# EAGLE board SparkFun_ADMP401-Breakout_Panel_v13 (EAGLE 7.4.0), part 1 of 6
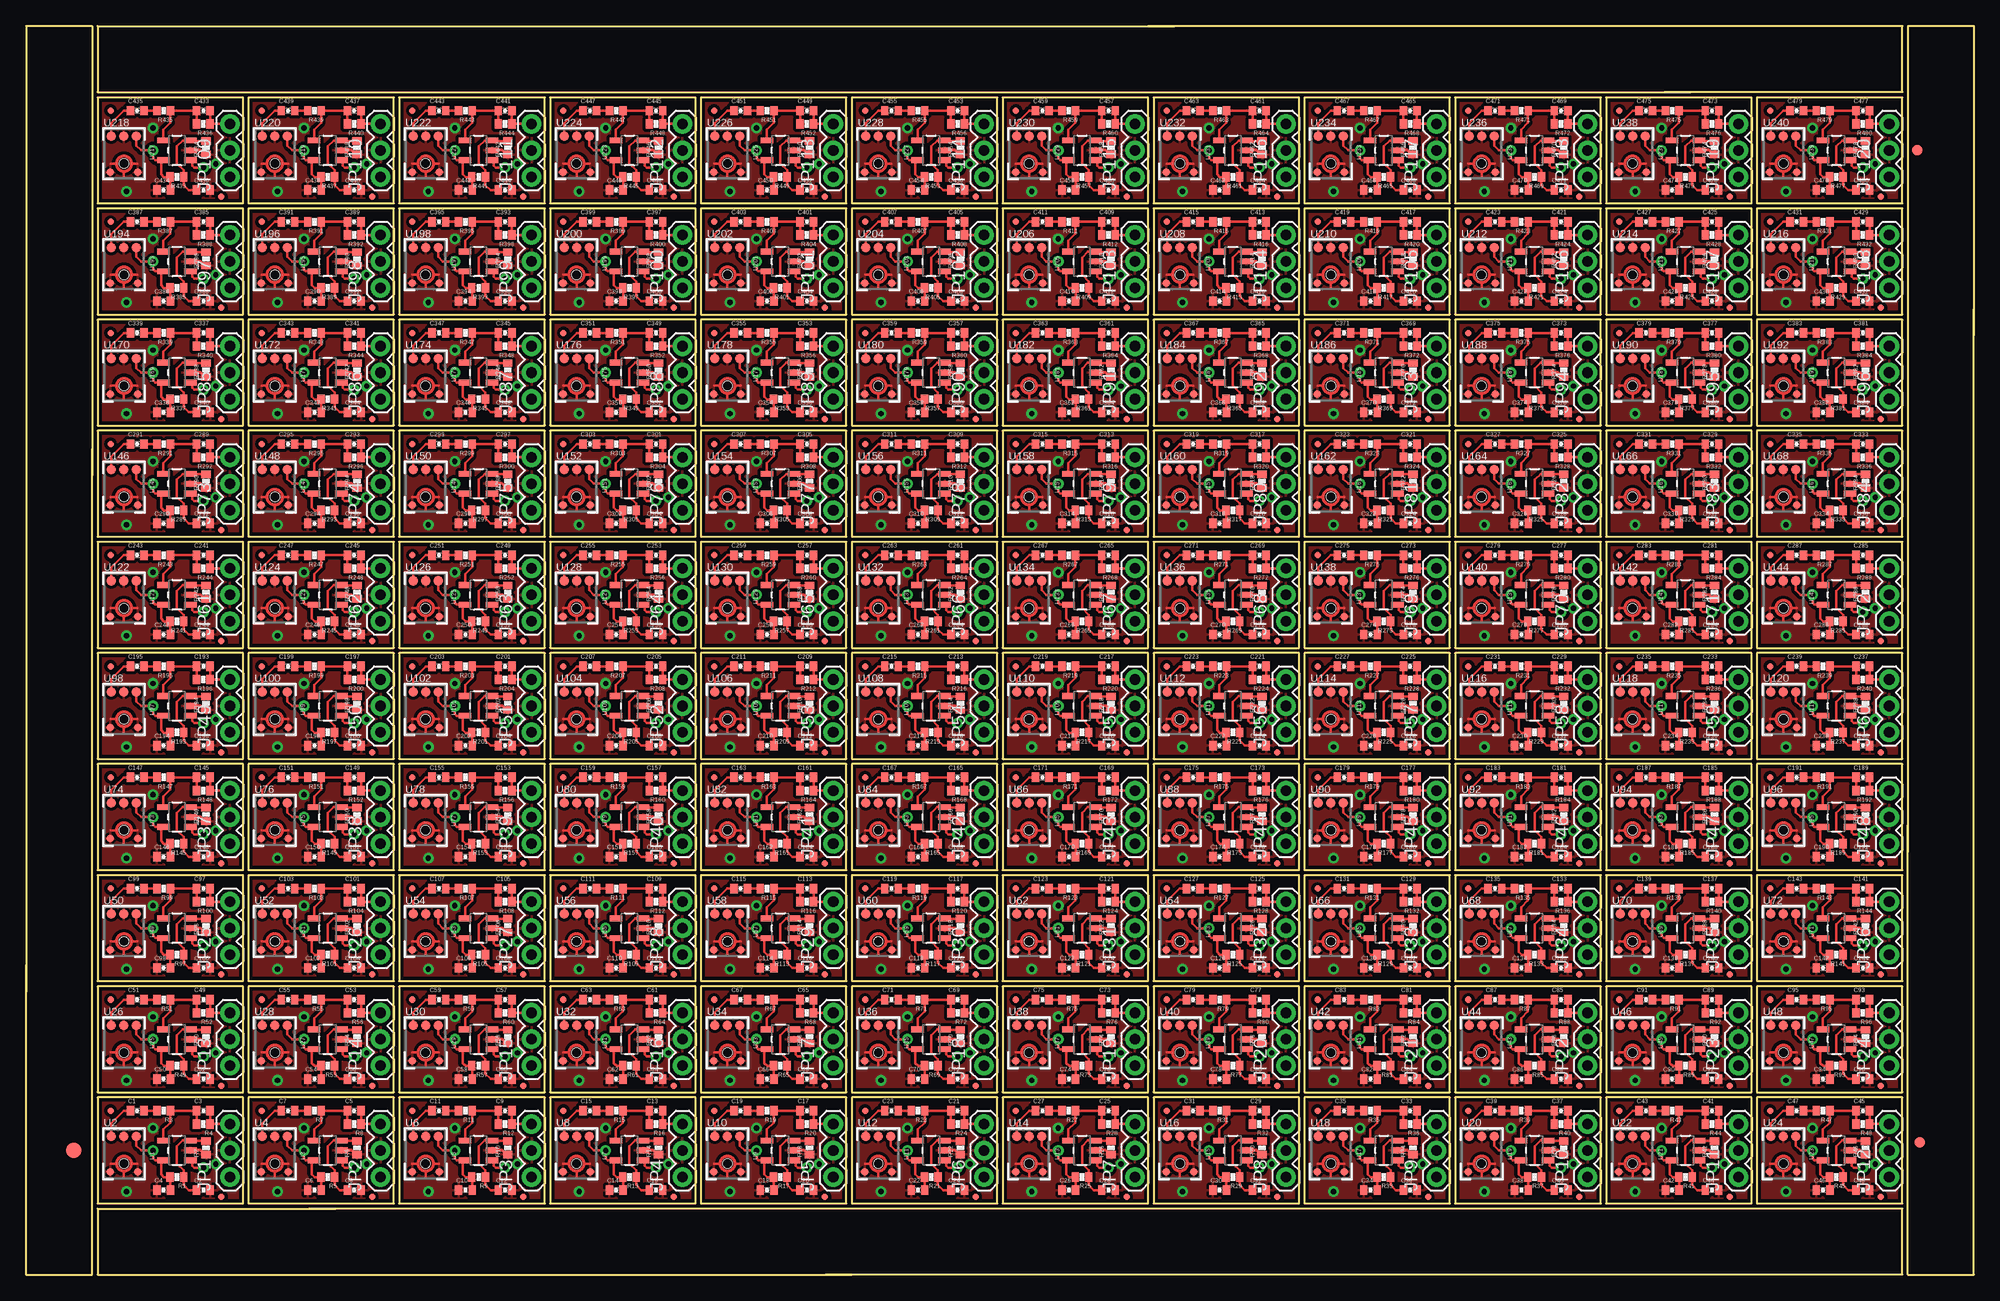
[diagram p0: board, top side]
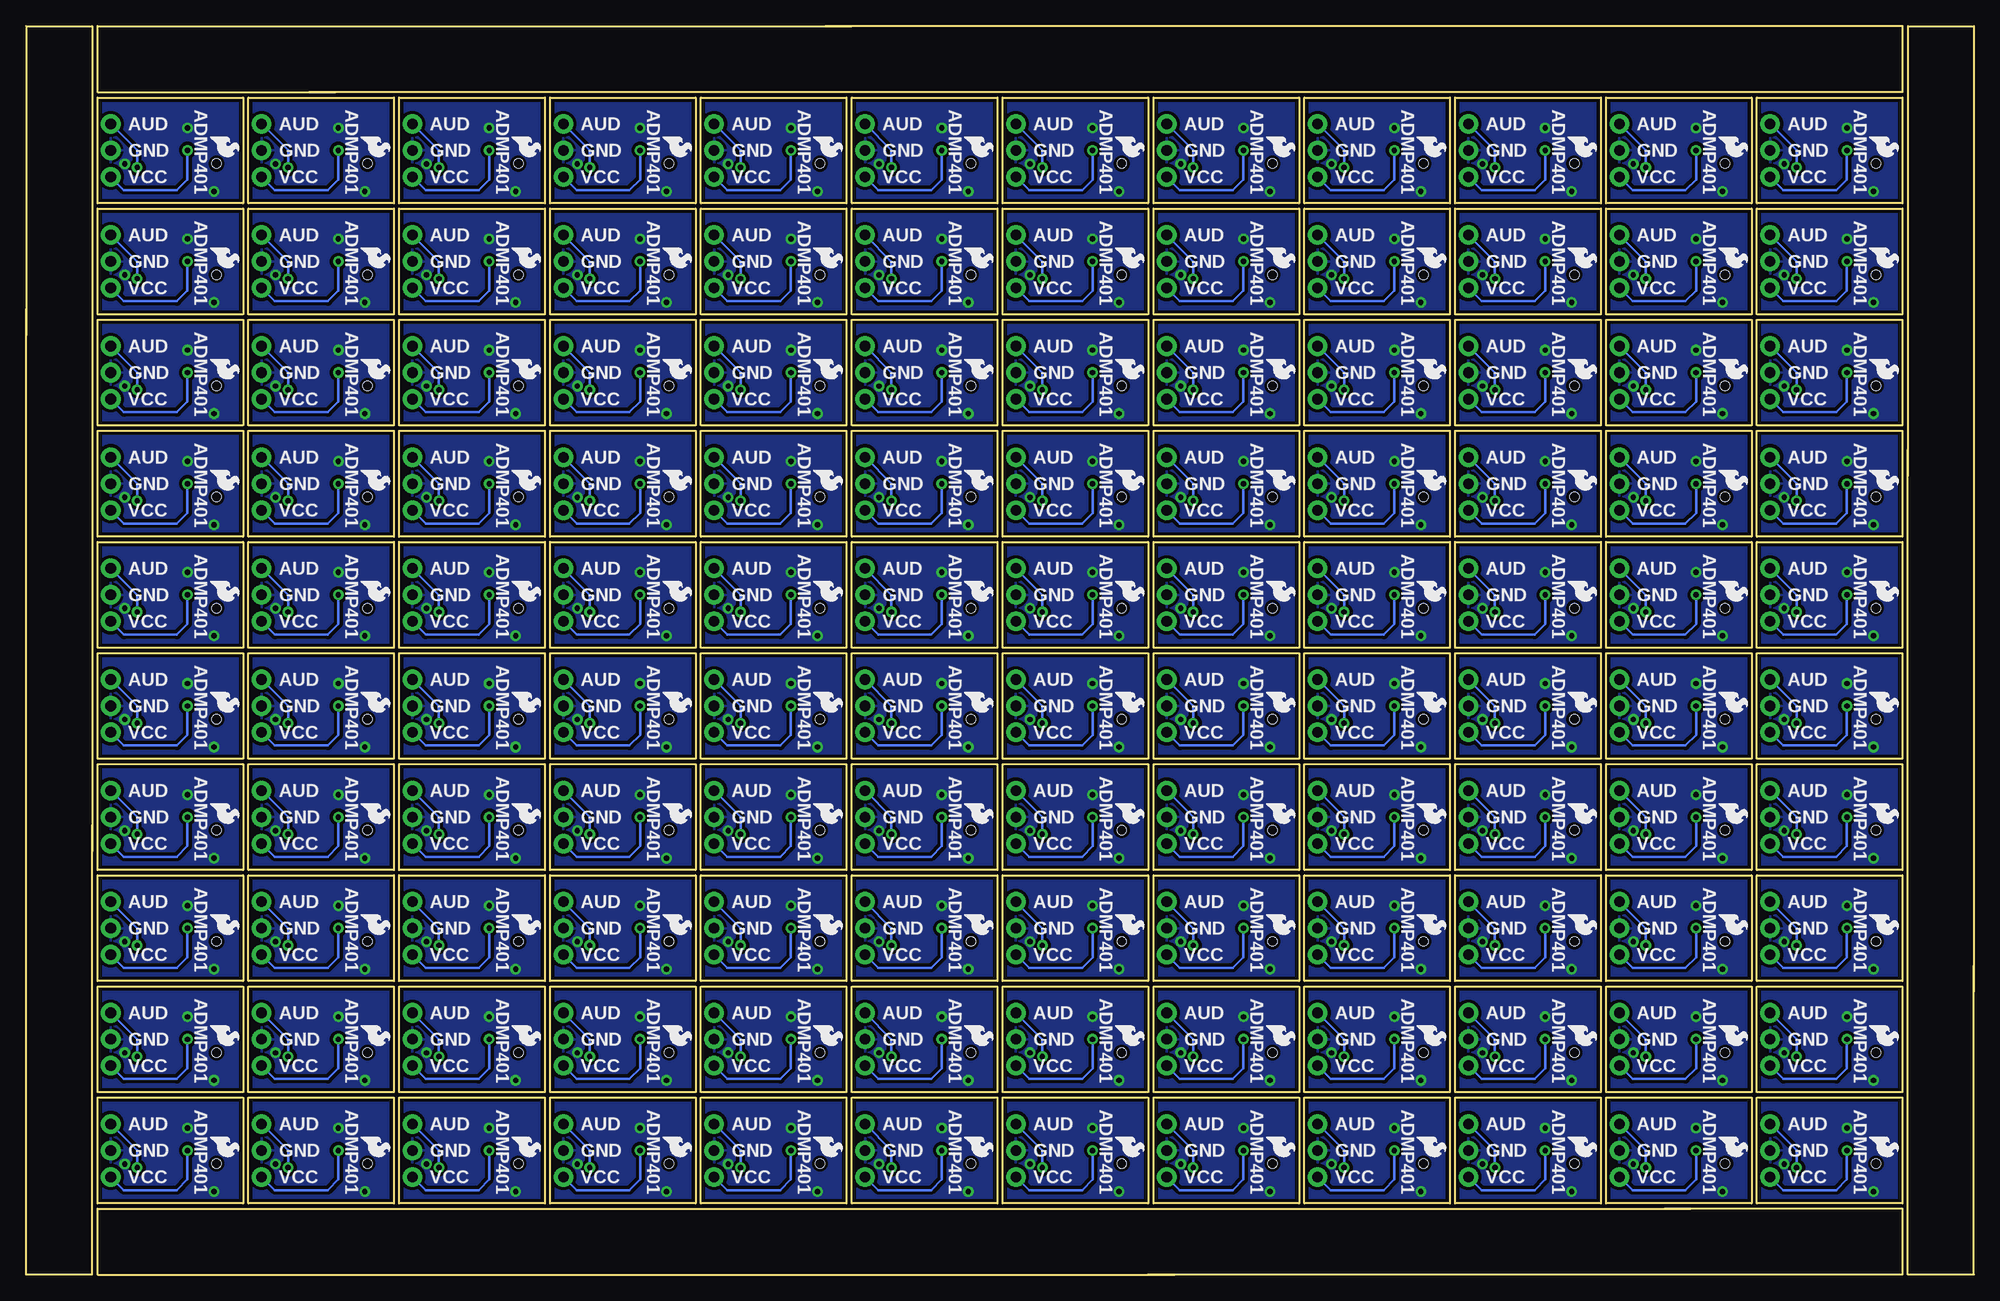
[diagram p1: board, bottom side, seen from below]

Size 186.94 x 119.89 mm. Coordinates in mm from the lower left corner, seen from the top.
Outline: 504 segments
Copper layers (1*16): Top 0.035mm / dielectric 1.5mm / Bottom 0.035mm
Design rules "SparkFun": minimum track width 8mil, minimum drill 20mil, track to track 8mil, track to pad 8mil, pad to pad 8mil, via to via 8mil, smd to smd 8mil, copper to edge 9mil, drill to drill 8mil, minimum pad ring 12mil, minimum via ring 10mil, stop-mask expansion 4mil, vias tented up to drill 20mil, thermal gap 10mil

## Footprints (pad centres in the part's own frame; a part is rotated, then mirrored left to right if it is on the bottom)
0402-CAP = smd 0.7 x 0.9: 1 -0.65,0; 2 0.65,0
MICRO-FIDUCIAL = smd 0.635 x 0.635: 1 0,0
FIDUCIAL-1.5X3 = smd 1.5 x 1.5: 1 0,0
FIDUCIAL-1X2 = smd 1 x 1: 1 0,0
1X03 = drill 1.016 pad 1.88: 1 0,0; 2 2.54,0; 3 5.08,0
0402-RES = smd 0.7 x 0.9: 1 -0.65,0; 2 0.65,0
SOT23-5 = smd 0.55 x 1.2: 1 -0.95,-1.3; 2 0,-1.3; 3 0.95,-1.3; 4 0.95,1.3; 5 -0.95,1.3
ADMP401 = smd 0.9 x 0.9: 1 -1.2,2.62; 5 1.2,2.62; 6 0,2.62 | smd 0.7 x 0.7: 2 1.3,-0.8; 4 -1.3,-0.8 | hole 0.9: 0,0

## Placement (x,y rotation side)
C1  4.7uF  [0402-CAP]  10.67,15.75 0 top
C2  1.0uF  [0402-CAP]  17.02,8.13 0 top
C3  100pF  [0402-CAP]  17.02,15.75 0 top
C4  0.1uF  [0402-CAP]  13.21,8.13 0 top
C5  100pF  [0402-CAP]  31.5,15.75 0 top
C6  0.1uF  [0402-CAP]  27.69,8.13 0 top
C7  4.7uF  [0402-CAP]  25.15,15.75 0 top
C8  1.0uF  [0402-CAP]  31.5,8.13 0 top
C9  100pF  [0402-CAP]  45.97,15.75 0 top
C10  0.1uF  [0402-CAP]  42.16,8.13 0 top
C11  4.7uF  [0402-CAP]  39.62,15.75 0 top
C12  1.0uF  [0402-CAP]  45.97,8.13 0 top
C13  100pF  [0402-CAP]  60.45,15.75 0 top
C14  0.1uF  [0402-CAP]  56.64,8.13 0 top
C15  4.7uF  [0402-CAP]  54.1,15.75 0 top
C16  1.0uF  [0402-CAP]  60.45,8.13 0 top
C17  100pF  [0402-CAP]  74.93,15.75 0 top
C18  0.1uF  [0402-CAP]  71.12,8.13 0 top
C19  4.7uF  [0402-CAP]  68.58,15.75 0 top
C20  1.0uF  [0402-CAP]  74.93,8.13 0 top
C21  100pF  [0402-CAP]  89.41,15.75 0 top
C22  0.1uF  [0402-CAP]  85.6,8.13 0 top
C23  4.7uF  [0402-CAP]  83.06,15.75 0 top
C24  1.0uF  [0402-CAP]  89.41,8.13 0 top
C25  100pF  [0402-CAP]  103.89,15.75 0 top
C26  0.1uF  [0402-CAP]  100.08,8.13 0 top
C27  4.7uF  [0402-CAP]  97.54,15.75 0 top
C28  1.0uF  [0402-CAP]  103.89,8.13 0 top
C29  100pF  [0402-CAP]  118.36,15.75 0 top
C30  0.1uF  [0402-CAP]  114.55,8.13 0 top
C31  4.7uF  [0402-CAP]  112.01,15.75 0 top
C32  1.0uF  [0402-CAP]  118.36,8.13 0 top
C33  100pF  [0402-CAP]  132.84,15.75 0 top
C34  0.1uF  [0402-CAP]  129.03,8.13 0 top
C35  4.7uF  [0402-CAP]  126.49,15.75 0 top
C36  1.0uF  [0402-CAP]  132.84,8.13 0 top
C37  100pF  [0402-CAP]  147.32,15.75 0 top
C38  0.1uF  [0402-CAP]  143.51,8.13 0 top
C39  4.7uF  [0402-CAP]  140.97,15.75 0 top
C40  1.0uF  [0402-CAP]  147.32,8.13 0 top
C41  100pF  [0402-CAP]  161.8,15.75 0 top
C42  0.1uF  [0402-CAP]  157.99,8.13 0 top
C43  4.7uF  [0402-CAP]  155.45,15.75 0 top
C44  1.0uF  [0402-CAP]  161.8,8.13 0 top
C45  100pF  [0402-CAP]  176.28,15.75 0 top
C46  0.1uF  [0402-CAP]  172.47,8.13 0 top
C47  4.7uF  [0402-CAP]  169.93,15.75 0 top
C48  1.0uF  [0402-CAP]  176.28,8.13 0 top
C49  100pF  [0402-CAP]  17.02,26.42 0 top
C50  0.1uF  [0402-CAP]  13.21,18.8 0 top
C51  4.7uF  [0402-CAP]  10.67,26.42 0 top
C52  1.0uF  [0402-CAP]  17.02,18.8 0 top
C53  100pF  [0402-CAP]  31.5,26.42 0 top
C54  0.1uF  [0402-CAP]  27.69,18.8 0 top
C55  4.7uF  [0402-CAP]  25.15,26.42 0 top
C56  1.0uF  [0402-CAP]  31.5,18.8 0 top
C57  100pF  [0402-CAP]  45.97,26.42 0 top
C58  0.1uF  [0402-CAP]  42.16,18.8 0 top
C59  4.7uF  [0402-CAP]  39.62,26.42 0 top
C60  1.0uF  [0402-CAP]  45.97,18.8 0 top
C61  100pF  [0402-CAP]  60.45,26.42 0 top
C62  0.1uF  [0402-CAP]  56.64,18.8 0 top
C63  4.7uF  [0402-CAP]  54.1,26.42 0 top
C64  1.0uF  [0402-CAP]  60.45,18.8 0 top
C65  100pF  [0402-CAP]  74.93,26.42 0 top
C66  0.1uF  [0402-CAP]  71.12,18.8 0 top
C67  4.7uF  [0402-CAP]  68.58,26.42 0 top
C68  1.0uF  [0402-CAP]  74.93,18.8 0 top
C69  100pF  [0402-CAP]  89.41,26.42 0 top
C70  0.1uF  [0402-CAP]  85.6,18.8 0 top
C71  4.7uF  [0402-CAP]  83.06,26.42 0 top
C72  1.0uF  [0402-CAP]  89.41,18.8 0 top
C73  100pF  [0402-CAP]  103.89,26.42 0 top
C74  0.1uF  [0402-CAP]  100.08,18.8 0 top
C75  4.7uF  [0402-CAP]  97.54,26.42 0 top
C76  1.0uF  [0402-CAP]  103.89,18.8 0 top
C77  100pF  [0402-CAP]  118.36,26.42 0 top
C78  0.1uF  [0402-CAP]  114.55,18.8 0 top
C79  4.7uF  [0402-CAP]  112.01,26.42 0 top
C80  1.0uF  [0402-CAP]  118.36,18.8 0 top
C81  100pF  [0402-CAP]  132.84,26.42 0 top
C82  0.1uF  [0402-CAP]  129.03,18.8 0 top
C83  4.7uF  [0402-CAP]  126.49,26.42 0 top
C84  1.0uF  [0402-CAP]  132.84,18.8 0 top
C85  100pF  [0402-CAP]  147.32,26.42 0 top
C86  0.1uF  [0402-CAP]  143.51,18.8 0 top
C87  4.7uF  [0402-CAP]  140.97,26.42 0 top
C88  1.0uF  [0402-CAP]  147.32,18.8 0 top
C89  100pF  [0402-CAP]  161.8,26.42 0 top
C90  0.1uF  [0402-CAP]  157.99,18.8 0 top
C91  4.7uF  [0402-CAP]  155.45,26.42 0 top
C92  1.0uF  [0402-CAP]  161.8,18.8 0 top
C93  100pF  [0402-CAP]  176.28,26.42 0 top
C94  0.1uF  [0402-CAP]  172.47,18.8 0 top
C95  4.7uF  [0402-CAP]  169.93,26.42 0 top
C96  1.0uF  [0402-CAP]  176.28,18.8 0 top
C97  100pF  [0402-CAP]  17.02,37.08 0 top
C98  0.1uF  [0402-CAP]  13.21,29.46 0 top
C99  4.7uF  [0402-CAP]  10.67,37.08 0 top
C100  1.0uF  [0402-CAP]  17.02,29.46 0 top
C101  100pF  [0402-CAP]  31.5,37.08 0 top
C102  0.1uF  [0402-CAP]  27.69,29.46 0 top
C103  4.7uF  [0402-CAP]  25.15,37.08 0 top
C104  1.0uF  [0402-CAP]  31.5,29.46 0 top
C105  100pF  [0402-CAP]  45.97,37.08 0 top
C106  0.1uF  [0402-CAP]  42.16,29.46 0 top
C107  4.7uF  [0402-CAP]  39.62,37.08 0 top
C108  1.0uF  [0402-CAP]  45.97,29.46 0 top
C109  100pF  [0402-CAP]  60.45,37.08 0 top
C110  0.1uF  [0402-CAP]  56.64,29.46 0 top
C111  4.7uF  [0402-CAP]  54.1,37.08 0 top
C112  1.0uF  [0402-CAP]  60.45,29.46 0 top
C113  100pF  [0402-CAP]  74.93,37.08 0 top
C114  0.1uF  [0402-CAP]  71.12,29.46 0 top
C115  4.7uF  [0402-CAP]  68.58,37.08 0 top
C116  1.0uF  [0402-CAP]  74.93,29.46 0 top
C117  100pF  [0402-CAP]  89.41,37.08 0 top
C118  0.1uF  [0402-CAP]  85.6,29.46 0 top
C119  4.7uF  [0402-CAP]  83.06,37.08 0 top
C120  1.0uF  [0402-CAP]  89.41,29.46 0 top
C121  100pF  [0402-CAP]  103.89,37.08 0 top
C122  0.1uF  [0402-CAP]  100.08,29.46 0 top
C123  4.7uF  [0402-CAP]  97.54,37.08 0 top
C124  1.0uF  [0402-CAP]  103.89,29.46 0 top
C125  100pF  [0402-CAP]  118.36,37.08 0 top
C126  0.1uF  [0402-CAP]  114.55,29.46 0 top
C127  4.7uF  [0402-CAP]  112.01,37.08 0 top
C128  1.0uF  [0402-CAP]  118.36,29.46 0 top
C129  100pF  [0402-CAP]  132.84,37.08 0 top
C130  0.1uF  [0402-CAP]  129.03,29.46 0 top
C131  4.7uF  [0402-CAP]  126.49,37.08 0 top
C132  1.0uF  [0402-CAP]  132.84,29.46 0 top
C133  100pF  [0402-CAP]  147.32,37.08 0 top
C134  0.1uF  [0402-CAP]  143.51,29.46 0 top
C135  4.7uF  [0402-CAP]  140.97,37.08 0 top
C136  1.0uF  [0402-CAP]  147.32,29.46 0 top
C137  100pF  [0402-CAP]  161.8,37.08 0 top
C138  0.1uF  [0402-CAP]  157.99,29.46 0 top
C139  4.7uF  [0402-CAP]  155.45,37.08 0 top
C140  1.0uF  [0402-CAP]  161.8,29.46 0 top
C141  100pF  [0402-CAP]  176.28,37.08 0 top
C142  0.1uF  [0402-CAP]  172.47,29.46 0 top
C143  4.7uF  [0402-CAP]  169.93,37.08 0 top
C144  1.0uF  [0402-CAP]  176.28,29.46 0 top
C145  100pF  [0402-CAP]  17.02,47.75 0 top
C146  0.1uF  [0402-CAP]  13.21,40.13 0 top
C147  4.7uF  [0402-CAP]  10.67,47.75 0 top
C148  1.0uF  [0402-CAP]  17.02,40.13 0 top
C149  100pF  [0402-CAP]  31.5,47.75 0 top
C150  0.1uF  [0402-CAP]  27.69,40.13 0 top
C151  4.7uF  [0402-CAP]  25.15,47.75 0 top
C152  1.0uF  [0402-CAP]  31.5,40.13 0 top
C153  100pF  [0402-CAP]  45.97,47.75 0 top
C154  0.1uF  [0402-CAP]  42.16,40.13 0 top
C155  4.7uF  [0402-CAP]  39.62,47.75 0 top
C156  1.0uF  [0402-CAP]  45.97,40.13 0 top
C157  100pF  [0402-CAP]  60.45,47.75 0 top
C158  0.1uF  [0402-CAP]  56.64,40.13 0 top
C159  4.7uF  [0402-CAP]  54.1,47.75 0 top
C160  1.0uF  [0402-CAP]  60.45,40.13 0 top
C161  100pF  [0402-CAP]  74.93,47.75 0 top
C162  0.1uF  [0402-CAP]  71.12,40.13 0 top
C163  4.7uF  [0402-CAP]  68.58,47.75 0 top
C164  1.0uF  [0402-CAP]  74.93,40.13 0 top
C165  100pF  [0402-CAP]  89.41,47.75 0 top
C166  0.1uF  [0402-CAP]  85.6,40.13 0 top
C167  4.7uF  [0402-CAP]  83.06,47.75 0 top
C168  1.0uF  [0402-CAP]  89.41,40.13 0 top
C169  100pF  [0402-CAP]  103.89,47.75 0 top
C170  0.1uF  [0402-CAP]  100.08,40.13 0 top
C171  4.7uF  [0402-CAP]  97.54,47.75 0 top
C172  1.0uF  [0402-CAP]  103.89,40.13 0 top
C173  100pF  [0402-CAP]  118.36,47.75 0 top
C174  0.1uF  [0402-CAP]  114.55,40.13 0 top
C175  4.7uF  [0402-CAP]  112.01,47.75 0 top
C176  1.0uF  [0402-CAP]  118.36,40.13 0 top
C177  100pF  [0402-CAP]  132.84,47.75 0 top
C178  0.1uF  [0402-CAP]  129.03,40.13 0 top
C179  4.7uF  [0402-CAP]  126.49,47.75 0 top
C180  1.0uF  [0402-CAP]  132.84,40.13 0 top
C181  100pF  [0402-CAP]  147.32,47.75 0 top
C182  0.1uF  [0402-CAP]  143.51,40.13 0 top
C183  4.7uF  [0402-CAP]  140.97,47.75 0 top
C184  1.0uF  [0402-CAP]  147.32,40.13 0 top
C185  100pF  [0402-CAP]  161.8,47.75 0 top
C186  0.1uF  [0402-CAP]  157.99,40.13 0 top
C187  4.7uF  [0402-CAP]  155.45,47.75 0 top
C188  1.0uF  [0402-CAP]  161.8,40.13 0 top
C189  100pF  [0402-CAP]  176.28,47.75 0 top
C190  0.1uF  [0402-CAP]  172.47,40.13 0 top
C191  4.7uF  [0402-CAP]  169.93,47.75 0 top
C192  1.0uF  [0402-CAP]  176.28,40.13 0 top
C193  100pF  [0402-CAP]  17.02,58.42 0 top
C194  0.1uF  [0402-CAP]  13.21,50.8 0 top
C195  4.7uF  [0402-CAP]  10.67,58.42 0 top
C196  1.0uF  [0402-CAP]  17.02,50.8 0 top
C197  100pF  [0402-CAP]  31.5,58.42 0 top
C198  0.1uF  [0402-CAP]  27.69,50.8 0 top
C199  4.7uF  [0402-CAP]  25.15,58.42 0 top
C200  1.0uF  [0402-CAP]  31.5,50.8 0 top
C201  100pF  [0402-CAP]  45.97,58.42 0 top
C202  0.1uF  [0402-CAP]  42.16,50.8 0 top
C203  4.7uF  [0402-CAP]  39.62,58.42 0 top
C204  1.0uF  [0402-CAP]  45.97,50.8 0 top
C205  100pF  [0402-CAP]  60.45,58.42 0 top
C206  0.1uF  [0402-CAP]  56.64,50.8 0 top
C207  4.7uF  [0402-CAP]  54.1,58.42 0 top
C208  1.0uF  [0402-CAP]  60.45,50.8 0 top
C209  100pF  [0402-CAP]  74.93,58.42 0 top
C210  0.1uF  [0402-CAP]  71.12,50.8 0 top
C211  4.7uF  [0402-CAP]  68.58,58.42 0 top
C212  1.0uF  [0402-CAP]  74.93,50.8 0 top
C213  100pF  [0402-CAP]  89.41,58.42 0 top
C214  0.1uF  [0402-CAP]  85.6,50.8 0 top
C215  4.7uF  [0402-CAP]  83.06,58.42 0 top
C216  1.0uF  [0402-CAP]  89.41,50.8 0 top
C217  100pF  [0402-CAP]  103.89,58.42 0 top
C218  0.1uF  [0402-CAP]  100.08,50.8 0 top
C219  4.7uF  [0402-CAP]  97.54,58.42 0 top
C220  1.0uF  [0402-CAP]  103.89,50.8 0 top
C221  100pF  [0402-CAP]  118.36,58.42 0 top
C222  0.1uF  [0402-CAP]  114.55,50.8 0 top
C223  4.7uF  [0402-CAP]  112.01,58.42 0 top
C224  1.0uF  [0402-CAP]  118.36,50.8 0 top
C225  100pF  [0402-CAP]  132.84,58.42 0 top
C226  0.1uF  [0402-CAP]  129.03,50.8 0 top
C227  4.7uF  [0402-CAP]  126.49,58.42 0 top
C228  1.0uF  [0402-CAP]  132.84,50.8 0 top
C229  100pF  [0402-CAP]  147.32,58.42 0 top
C230  0.1uF  [0402-CAP]  143.51,50.8 0 top
C231  4.7uF  [0402-CAP]  140.97,58.42 0 top
C232  1.0uF  [0402-CAP]  147.32,50.8 0 top
C233  100pF  [0402-CAP]  161.8,58.42 0 top
C234  0.1uF  [0402-CAP]  157.99,50.8 0 top
C235  4.7uF  [0402-CAP]  155.45,58.42 0 top
C236  1.0uF  [0402-CAP]  161.8,50.8 0 top
C237  100pF  [0402-CAP]  176.28,58.42 0 top
C238  0.1uF  [0402-CAP]  172.47,50.8 0 top
C239  4.7uF  [0402-CAP]  169.93,58.42 0 top
C240  1.0uF  [0402-CAP]  176.28,50.8 0 top
C241  100pF  [0402-CAP]  17.02,69.09 0 top
C242  0.1uF  [0402-CAP]  13.21,61.47 0 top
C243  4.7uF  [0402-CAP]  10.67,69.09 0 top
C244  1.0uF  [0402-CAP]  17.02,61.47 0 top
C245  100pF  [0402-CAP]  31.5,69.09 0 top
C246  0.1uF  [0402-CAP]  27.69,61.47 0 top
C247  4.7uF  [0402-CAP]  25.15,69.09 0 top
C248  1.0uF  [0402-CAP]  31.5,61.47 0 top
C249  100pF  [0402-CAP]  45.97,69.09 0 top
C250  0.1uF  [0402-CAP]  42.16,61.47 0 top
C251  4.7uF  [0402-CAP]  39.62,69.09 0 top
C252  1.0uF  [0402-CAP]  45.97,61.47 0 top
C253  100pF  [0402-CAP]  60.45,69.09 0 top
C254  0.1uF  [0402-CAP]  56.64,61.47 0 top
C255  4.7uF  [0402-CAP]  54.1,69.09 0 top
C256  1.0uF  [0402-CAP]  60.45,61.47 0 top
C257  100pF  [0402-CAP]  74.93,69.09 0 top
C258  0.1uF  [0402-CAP]  71.12,61.47 0 top
C259  4.7uF  [0402-CAP]  68.58,69.09 0 top
C260  1.0uF  [0402-CAP]  74.93,61.47 0 top
C261  100pF  [0402-CAP]  89.41,69.09 0 top
C262  0.1uF  [0402-CAP]  85.6,61.47 0 top
C263  4.7uF  [0402-CAP]  83.06,69.09 0 top
C264  1.0uF  [0402-CAP]  89.41,61.47 0 top
C265  100pF  [0402-CAP]  103.89,69.09 0 top
C266  0.1uF  [0402-CAP]  100.08,61.47 0 top
C267  4.7uF  [0402-CAP]  97.54,69.09 0 top
C268  1.0uF  [0402-CAP]  103.89,61.47 0 top
C269  100pF  [0402-CAP]  118.36,69.09 0 top
C270  0.1uF  [0402-CAP]  114.55,61.47 0 top
C271  4.7uF  [0402-CAP]  112.01,69.09 0 top
C272  1.0uF  [0402-CAP]  118.36,61.47 0 top
C273  100pF  [0402-CAP]  132.84,69.09 0 top
C274  0.1uF  [0402-CAP]  129.03,61.47 0 top
C275  4.7uF  [0402-CAP]  126.49,69.09 0 top
C276  1.0uF  [0402-CAP]  132.84,61.47 0 top
C277  100pF  [0402-CAP]  147.32,69.09 0 top
C278  0.1uF  [0402-CAP]  143.51,61.47 0 top
C279  4.7uF  [0402-CAP]  140.97,69.09 0 top
C280  1.0uF  [0402-CAP]  147.32,61.47 0 top
C281  100pF  [0402-CAP]  161.8,69.09 0 top
C282  0.1uF  [0402-CAP]  157.99,61.47 0 top
C283  4.7uF  [0402-CAP]  155.45,69.09 0 top
C284  1.0uF  [0402-CAP]  161.8,61.47 0 top
C285  100pF  [0402-CAP]  176.28,69.09 0 top
C286  0.1uF  [0402-CAP]  172.47,61.47 0 top
C287  4.7uF  [0402-CAP]  169.93,69.09 0 top
C288  1.0uF  [0402-CAP]  176.28,61.47 0 top
C289  100pF  [0402-CAP]  17.02,79.76 0 top
C290  0.1uF  [0402-CAP]  13.21,72.14 0 top
C291  4.7uF  [0402-CAP]  10.67,79.76 0 top
C292  1.0uF  [0402-CAP]  17.02,72.14 0 top
C293  100pF  [0402-CAP]  31.5,79.76 0 top
C294  0.1uF  [0402-CAP]  27.69,72.14 0 top
C295  4.7uF  [0402-CAP]  25.15,79.76 0 top
C296  1.0uF  [0402-CAP]  31.5,72.14 0 top
C297  100pF  [0402-CAP]  45.97,79.76 0 top
C298  0.1uF  [0402-CAP]  42.16,72.14 0 top
C299  4.7uF  [0402-CAP]  39.62,79.76 0 top
C300  1.0uF  [0402-CAP]  45.97,72.14 0 top
C301  100pF  [0402-CAP]  60.45,79.76 0 top
C302  0.1uF  [0402-CAP]  56.64,72.14 0 top
C303  4.7uF  [0402-CAP]  54.1,79.76 0 top
C304  1.0uF  [0402-CAP]  60.45,72.14 0 top
C305  100pF  [0402-CAP]  74.93,79.76 0 top
C306  0.1uF  [0402-CAP]  71.12,72.14 0 top
C307  4.7uF  [0402-CAP]  68.58,79.76 0 top
C308  1.0uF  [0402-CAP]  74.93,72.14 0 top
C309  100pF  [0402-CAP]  89.41,79.76 0 top
C310  0.1uF  [0402-CAP]  85.6,72.14 0 top
C311  4.7uF  [0402-CAP]  83.06,79.76 0 top
C312  1.0uF  [0402-CAP]  89.41,72.14 0 top
C313  100pF  [0402-CAP]  103.89,79.76 0 top
C314  0.1uF  [0402-CAP]  100.08,72.14 0 top
C315  4.7uF  [0402-CAP]  97.54,79.76 0 top
C316  1.0uF  [0402-CAP]  103.89,72.14 0 top
C317  100pF  [0402-CAP]  118.36,79.76 0 top
C318  0.1uF  [0402-CAP]  114.55,72.14 0 top
C319  4.7uF  [0402-CAP]  112.01,79.76 0 top
C320  1.0uF  [0402-CAP]  118.36,72.14 0 top
C321  100pF  [0402-CAP]  132.84,79.76 0 top
C322  0.1uF  [0402-CAP]  129.03,72.14 0 top
C323  4.7uF  [0402-CAP]  126.49,79.76 0 top
C324  1.0uF  [0402-CAP]  132.84,72.14 0 top
C325  100pF  [0402-CAP]  147.32,79.76 0 top
C326  0.1uF  [0402-CAP]  143.51,72.14 0 top
C327  4.7uF  [0402-CAP]  140.97,79.76 0 top
C328  1.0uF  [0402-CAP]  147.32,72.14 0 top
C329  100pF  [0402-CAP]  161.8,79.76 0 top
C330  0.1uF  [0402-CAP]  157.99,72.14 0 top
C331  4.7uF  [0402-CAP]  155.45,79.76 0 top
C332  1.0uF  [0402-CAP]  161.8,72.14 0 top
C333  100pF  [0402-CAP]  176.28,79.76 0 top
C334  0.1uF  [0402-CAP]  172.47,72.14 0 top
C335  4.7uF  [0402-CAP]  169.93,79.76 0 top
C336  1.0uF  [0402-CAP]  176.28,72.14 0 top
C337  100pF  [0402-CAP]  17.02,90.42 0 top
C338  0.1uF  [0402-CAP]  13.21,82.8 0 top
C339  4.7uF  [0402-CAP]  10.67,90.42 0 top
C340  1.0uF  [0402-CAP]  17.02,82.8 0 top
C341  100pF  [0402-CAP]  31.5,90.42 0 top
C342  0.1uF  [0402-CAP]  27.69,82.8 0 top
C343  4.7uF  [0402-CAP]  25.15,90.42 0 top
C344  1.0uF  [0402-CAP]  31.5,82.8 0 top
C345  100pF  [0402-CAP]  45.97,90.42 0 top
C346  0.1uF  [0402-CAP]  42.16,82.8 0 top
C347  4.7uF  [0402-CAP]  39.62,90.42 0 top
C348  1.0uF  [0402-CAP]  45.97,82.8 0 top
C349  100pF  [0402-CAP]  60.45,90.42 0 top
C350  0.1uF  [0402-CAP]  56.64,82.8 0 top
C351  4.7uF  [0402-CAP]  54.1,90.42 0 top
C352  1.0uF  [0402-CAP]  60.45,82.8 0 top
C353  100pF  [0402-CAP]  74.93,90.42 0 top
C354  0.1uF  [0402-CAP]  71.12,82.8 0 top
C355  4.7uF  [0402-CAP]  68.58,90.42 0 top
C356  1.0uF  [0402-CAP]  74.93,82.8 0 top
C357  100pF  [0402-CAP]  89.41,90.42 0 top
C358  0.1uF  [0402-CAP]  85.6,82.8 0 top
C359  4.7uF  [0402-CAP]  83.06,90.42 0 top
C360  1.0uF  [0402-CAP]  89.41,82.8 0 top
C361  100pF  [0402-CAP]  103.89,90.42 0 top
C362  0.1uF  [0402-CAP]  100.08,82.8 0 top
C363  4.7uF  [0402-CAP]  97.54,90.42 0 top
C364  1.0uF  [0402-CAP]  103.89,82.8 0 top
C365  100pF  [0402-CAP]  118.36,90.42 0 top
C366  0.1uF  [0402-CAP]  114.55,82.8 0 top
C367  4.7uF  [0402-CAP]  112.01,90.42 0 top
C368  1.0uF  [0402-CAP]  118.36,82.8 0 top
C369  100pF  [0402-CAP]  132.84,90.42 0 top
C370  0.1uF  [0402-CAP]  129.03,82.8 0 top
C371  4.7uF  [0402-CAP]  126.49,90.42 0 top
C372  1.0uF  [0402-CAP]  132.84,82.8 0 top
C373  100pF  [0402-CAP]  147.32,90.42 0 top
C374  0.1uF  [0402-CAP]  143.51,82.8 0 top
C375  4.7uF  [0402-CAP]  140.97,90.42 0 top
C376  1.0uF  [0402-CAP]  147.32,82.8 0 top
C377  100pF  [0402-CAP]  161.8,90.42 0 top
C378  0.1uF  [0402-CAP]  157.99,82.8 0 top
C379  4.7uF  [0402-CAP]  155.45,90.42 0 top
C380  1.0uF  [0402-CAP]  161.8,82.8 0 top
C381  100pF  [0402-CAP]  176.28,90.42 0 top
C382  0.1uF  [0402-CAP]  172.47,82.8 0 top
C383  4.7uF  [0402-CAP]  169.93,90.42 0 top
C384  1.0uF  [0402-CAP]  176.28,82.8 0 top
C385  100pF  [0402-CAP]  17.02,101.09 0 top
C386  0.1uF  [0402-CAP]  13.21,93.47 0 top
C387  4.7uF  [0402-CAP]  10.67,101.09 0 top
C388  1.0uF  [0402-CAP]  17.02,93.47 0 top
C389  100pF  [0402-CAP]  31.5,101.09 0 top
C390  0.1uF  [0402-CAP]  27.69,93.47 0 top
C391  4.7uF  [0402-CAP]  25.15,101.09 0 top
C392  1.0uF  [0402-CAP]  31.5,93.47 0 top
C393  100pF  [0402-CAP]  45.97,101.09 0 top
C394  0.1uF  [0402-CAP]  42.16,93.47 0 top
C395  4.7uF  [0402-CAP]  39.62,101.09 0 top
C396  1.0uF  [0402-CAP]  45.97,93.47 0 top
C397  100pF  [0402-CAP]  60.45,101.09 0 top
C398  0.1uF  [0402-CAP]  56.64,93.47 0 top
C399  4.7uF  [0402-CAP]  54.1,101.09 0 top
C400  1.0uF  [0402-CAP]  60.45,93.47 0 top
C401  100pF  [0402-CAP]  74.93,101.09 0 top
C402  0.1uF  [0402-CAP]  71.12,93.47 0 top
C403  4.7uF  [0402-CAP]  68.58,101.09 0 top
C404  1.0uF  [0402-CAP]  74.93,93.47 0 top
C405  100pF  [0402-CAP]  89.41,101.09 0 top
C406  0.1uF  [0402-CAP]  85.6,93.47 0 top
C407  4.7uF  [0402-CAP]  83.06,101.09 0 top
C408  1.0uF  [0402-CAP]  89.41,93.47 0 top
C409  100pF  [0402-CAP]  103.89,101.09 0 top
C410  0.1uF  [0402-CAP]  100.08,93.47 0 top
C411  4.7uF  [0402-CAP]  97.54,101.09 0 top
C412  1.0uF  [0402-CAP]  103.89,93.47 0 top
C413  100pF  [0402-CAP]  118.36,101.09 0 top
C414  0.1uF  [0402-CAP]  114.55,93.47 0 top
C415  4.7uF  [0402-CAP]  112.01,101.09 0 top
C416  1.0uF  [0402-CAP]  118.36,93.47 0 top
C417  100pF  [0402-CAP]  132.84,101.09 0 top
C418  0.1uF  [0402-CAP]  129.03,93.47 0 top
C419  4.7uF  [0402-CAP]  126.49,101.09 0 top
C420  1.0uF  [0402-CAP]  132.84,93.47 0 top
C421  100pF  [0402-CAP]  147.32,101.09 0 top
C422  0.1uF  [0402-CAP]  143.51,93.47 0 top
C423  4.7uF  [0402-CAP]  140.97,101.09 0 top
C424  1.0uF  [0402-CAP]  147.32,93.47 0 top
C425  100pF  [0402-CAP]  161.8,101.09 0 top
C426  0.1uF  [0402-CAP]  157.99,93.47 0 top
C427  4.7uF  [0402-CAP]  155.45,101.09 0 top
C428  1.0uF  [0402-CAP]  161.8,93.47 0 top
C429  100pF  [0402-CAP]  176.28,101.09 0 top
C430  0.1uF  [0402-CAP]  172.47,93.47 0 top
C431  4.7uF  [0402-CAP]  169.93,101.09 0 top
C432  1.0uF  [0402-CAP]  176.28,93.47 0 top
C433  100pF  [0402-CAP]  17.02,111.76 0 top
C434  0.1uF  [0402-CAP]  13.21,104.14 0 top
C435  4.7uF  [0402-CAP]  10.67,111.76 0 top
C436  1.0uF  [0402-CAP]  17.02,104.14 0 top
C437  100pF  [0402-CAP]  31.5,111.76 0 top
C438  0.1uF  [0402-CAP]  27.69,104.14 0 top
C439  4.7uF  [0402-CAP]  25.15,111.76 0 top
C440  1.0uF  [0402-CAP]  31.5,104.14 0 top
C441  100pF  [0402-CAP]  45.97,111.76 0 top
C442  0.1uF  [0402-CAP]  42.16,104.14 0 top
C443  4.7uF  [0402-CAP]  39.62,111.76 0 top
C444  1.0uF  [0402-CAP]  45.97,104.14 0 top
C445  100pF  [0402-CAP]  60.45,111.76 0 top
C446  0.1uF  [0402-CAP]  56.64,104.14 0 top
C447  4.7uF  [0402-CAP]  54.1,111.76 0 top
C448  1.0uF  [0402-CAP]  60.45,104.14 0 top
C449  100pF  [0402-CAP]  74.93,111.76 0 top
C450  0.1uF  [0402-CAP]  71.12,104.14 0 top
C451  4.7uF  [0402-CAP]  68.58,111.76 0 top
C452  1.0uF  [0402-CAP]  74.93,104.14 0 top
C453  100pF  [0402-CAP]  89.41,111.76 0 top
C454  0.1uF  [0402-CAP]  85.6,104.14 0 top
C455  4.7uF  [0402-CAP]  83.06,111.76 0 top
C456  1.0uF  [0402-CAP]  89.41,104.14 0 top
C457  100pF  [0402-CAP]  103.89,111.76 0 top
C458  0.1uF  [0402-CAP]  100.08,104.14 0 top
C459  4.7uF  [0402-CAP]  97.54,111.76 0 top
C460  1.0uF  [0402-CAP]  103.89,104.14 0 top
C461  100pF  [0402-CAP]  118.36,111.76 0 top
C462  0.1uF  [0402-CAP]  114.55,104.14 0 top
C463  4.7uF  [0402-CAP]  112.01,111.76 0 top
C464  1.0uF  [0402-CAP]  118.36,104.14 0 top
C465  100pF  [0402-CAP]  132.84,111.76 0 top
C466  0.1uF  [0402-CAP]  129.03,104.14 0 top
C467  4.7uF  [0402-CAP]  126.49,111.76 0 top
C468  1.0uF  [0402-CAP]  132.84,104.14 0 top
C469  100pF  [0402-CAP]  147.32,111.76 0 top
C470  0.1uF  [0402-CAP]  143.51,104.14 0 top
C471  4.7uF  [0402-CAP]  140.97,111.76 0 top
C472  1.0uF  [0402-CAP]  147.32,104.14 0 top
C473  100pF  [0402-CAP]  161.8,111.76 0 top
C474  0.1uF  [0402-CAP]  157.99,104.14 0 top
C475  4.7uF  [0402-CAP]  155.45,111.76 0 top
C476  1.0uF  [0402-CAP]  161.8,104.14 0 top
C477  100pF  [0402-CAP]  176.28,111.76 0 top
C478  0.1uF  [0402-CAP]  172.47,104.14 0 top
C479  4.7uF  [0402-CAP]  169.93,111.76 0 top
C480  1.0uF  [0402-CAP]  176.28,104.14 0 top
E$1  [MICRO-FIDUCIAL]  8.13,15.75 0 top
E$2  [MICRO-FIDUCIAL]  18.75,7.49 0 top
E$3  [MICRO-FIDUCIAL]  22.61,15.75 0 top
E$4  [MICRO-FIDUCIAL]  33.22,7.49 0 top
E$5  [MICRO-FIDUCIAL]  37.08,15.75 0 top
E$6  [MICRO-FIDUCIAL]  47.7,7.49 0 top
E$7  [MICRO-FIDUCIAL]  51.56,15.75 0 top
E$8  [MICRO-FIDUCIAL]  62.18,7.49 0 top
E$9  [MICRO-FIDUCIAL]  66.04,15.75 0 top
E$10  [MICRO-FIDUCIAL]  76.66,7.49 0 top
E$11  [MICRO-FIDUCIAL]  80.52,15.75 0 top
E$12  [MICRO-FIDUCIAL]  91.14,7.49 0 top
E$13  [MICRO-FIDUCIAL]  95,15.75 0 top
E$14  [MICRO-FIDUCIAL]  105.61,7.49 0 top
E$15  [MICRO-FIDUCIAL]  109.47,15.75 0 top
E$16  [MICRO-FIDUCIAL]  120.09,7.49 0 top
E$17  [MICRO-FIDUCIAL]  123.95,15.75 0 top
E$18  [MICRO-FIDUCIAL]  134.57,7.49 0 top
E$19  [MICRO-FIDUCIAL]  138.43,15.75 0 top
E$20  [MICRO-FIDUCIAL]  149.05,7.49 0 top
E$21  [MICRO-FIDUCIAL]  152.91,15.75 0 top
E$22  [MICRO-FIDUCIAL]  163.53,7.49 0 top
E$23  [MICRO-FIDUCIAL]  167.39,15.75 0 top
E$24  [MICRO-FIDUCIAL]  178,7.49 0 top
E$25  [MICRO-FIDUCIAL]  8.13,26.42 0 top
E$26  [MICRO-FIDUCIAL]  18.75,18.16 0 top
E$27  [MICRO-FIDUCIAL]  22.61,26.42 0 top
E$28  [MICRO-FIDUCIAL]  33.22,18.16 0 top
E$29  [MICRO-FIDUCIAL]  37.08,26.42 0 top
E$30  [MICRO-FIDUCIAL]  47.7,18.16 0 top
E$31  [MICRO-FIDUCIAL]  51.56,26.42 0 top
E$32  [MICRO-FIDUCIAL]  62.18,18.16 0 top
E$33  [MICRO-FIDUCIAL]  66.04,26.42 0 top
E$34  [MICRO-FIDUCIAL]  76.66,18.16 0 top
E$35  [MICRO-FIDUCIAL]  80.52,26.42 0 top
E$36  [MICRO-FIDUCIAL]  91.14,18.16 0 top
E$37  [MICRO-FIDUCIAL]  95,26.42 0 top
E$38  [MICRO-FIDUCIAL]  105.61,18.16 0 top
E$39  [MICRO-FIDUCIAL]  109.47,26.42 0 top
E$40  [MICRO-FIDUCIAL]  120.09,18.16 0 top
E$41  [MICRO-FIDUCIAL]  123.95,26.42 0 top
E$42  [MICRO-FIDUCIAL]  134.57,18.16 0 top
E$43  [MICRO-FIDUCIAL]  138.43,26.42 0 top
E$44  [MICRO-FIDUCIAL]  149.05,18.16 0 top
E$45  [MICRO-FIDUCIAL]  152.91,26.42 0 top
E$46  [MICRO-FIDUCIAL]  163.53,18.16 0 top
E$47  [MICRO-FIDUCIAL]  167.39,26.42 0 top
E$48  [MICRO-FIDUCIAL]  178,18.16 0 top
E$49  [MICRO-FIDUCIAL]  8.13,37.08 0 top
E$50  [MICRO-FIDUCIAL]  18.75,28.83 0 top
E$51  [MICRO-FIDUCIAL]  22.61,37.08 0 top
E$52  [MICRO-FIDUCIAL]  33.22,28.83 0 top
E$53  [MICRO-FIDUCIAL]  37.08,37.08 0 top
E$54  [MICRO-FIDUCIAL]  47.7,28.83 0 top
E$55  [MICRO-FIDUCIAL]  51.56,37.08 0 top
E$56  [MICRO-FIDUCIAL]  62.18,28.83 0 top
E$57  [MICRO-FIDUCIAL]  66.04,37.08 0 top
E$58  [MICRO-FIDUCIAL]  76.66,28.83 0 top
E$59  [MICRO-FIDUCIAL]  80.52,37.08 0 top
E$60  [MICRO-FIDUCIAL]  91.14,28.83 0 top
E$61  [MICRO-FIDUCIAL]  95,37.08 0 top
E$62  [MICRO-FIDUCIAL]  105.61,28.83 0 top
E$63  [MICRO-FIDUCIAL]  109.47,37.08 0 top
E$64  [MICRO-FIDUCIAL]  120.09,28.83 0 top
E$65  [MICRO-FIDUCIAL]  123.95,37.08 0 top
E$66  [MICRO-FIDUCIAL]  134.57,28.83 0 top
E$67  [MICRO-FIDUCIAL]  138.43,37.08 0 top
E$68  [MICRO-FIDUCIAL]  149.05,28.83 0 top
E$69  [MICRO-FIDUCIAL]  152.91,37.08 0 top
E$70  [MICRO-FIDUCIAL]  163.53,28.83 0 top
E$71  [MICRO-FIDUCIAL]  167.39,37.08 0 top
E$72  [MICRO-FIDUCIAL]  178,28.83 0 top
E$73  [MICRO-FIDUCIAL]  8.13,47.75 0 top
E$74  [MICRO-FIDUCIAL]  18.75,39.5 0 top
E$75  [MICRO-FIDUCIAL]  22.61,47.75 0 top
E$76  [MICRO-FIDUCIAL]  33.22,39.5 0 top
E$77  [MICRO-FIDUCIAL]  37.08,47.75 0 top
E$78  [MICRO-FIDUCIAL]  47.7,39.5 0 top
E$79  [MICRO-FIDUCIAL]  51.56,47.75 0 top
E$80  [MICRO-FIDUCIAL]  62.18,39.5 0 top
E$81  [MICRO-FIDUCIAL]  66.04,47.75 0 top
E$82  [MICRO-FIDUCIAL]  76.66,39.5 0 top
E$83  [MICRO-FIDUCIAL]  80.52,47.75 0 top
E$84  [MICRO-FIDUCIAL]  91.14,39.5 0 top
E$85  [MICRO-FIDUCIAL]  95,47.75 0 top
E$86  [MICRO-FIDUCIAL]  105.61,39.5 0 top
E$87  [MICRO-FIDUCIAL]  109.47,47.75 0 top
E$88  [MICRO-FIDUCIAL]  120.09,39.5 0 top
E$89  [MICRO-FIDUCIAL]  123.95,47.75 0 top
E$90  [MICRO-FIDUCIAL]  134.57,39.5 0 top
E$91  [MICRO-FIDUCIAL]  138.43,47.75 0 top
E$92  [MICRO-FIDUCIAL]  149.05,39.5 0 top
E$93  [MICRO-FIDUCIAL]  152.91,47.75 0 top
E$94  [MICRO-FIDUCIAL]  163.53,39.5 0 top
E$95  [MICRO-FIDUCIAL]  167.39,47.75 0 top
E$96  [MICRO-FIDUCIAL]  178,39.5 0 top
E$97  [MICRO-FIDUCIAL]  8.13,58.42 0 top
E$98  [MICRO-FIDUCIAL]  18.75,50.16 0 top
E$99  [MICRO-FIDUCIAL]  22.61,58.42 0 top
E$100  [MICRO-FIDUCIAL]  33.22,50.16 0 top
E$101  [MICRO-FIDUCIAL]  37.08,58.42 0 top
E$102  [MICRO-FIDUCIAL]  47.7,50.16 0 top
E$103  [MICRO-FIDUCIAL]  51.56,58.42 0 top
E$104  [MICRO-FIDUCIAL]  62.18,50.16 0 top
E$105  [MICRO-FIDUCIAL]  66.04,58.42 0 top
E$106  [MICRO-FIDUCIAL]  76.66,50.16 0 top
E$107  [MICRO-FIDUCIAL]  80.52,58.42 0 top
E$108  [MICRO-FIDUCIAL]  91.14,50.16 0 top
E$109  [MICRO-FIDUCIAL]  95,58.42 0 top
E$110  [MICRO-FIDUCIAL]  105.61,50.16 0 top
E$111  [MICRO-FIDUCIAL]  109.47,58.42 0 top
E$112  [MICRO-FIDUCIAL]  120.09,50.16 0 top
E$113  [MICRO-FIDUCIAL]  123.95,58.42 0 top
E$114  [MICRO-FIDUCIAL]  134.57,50.16 0 top
E$115  [MICRO-FIDUCIAL]  138.43,58.42 0 top
E$116  [MICRO-FIDUCIAL]  149.05,50.16 0 top
E$117  [MICRO-FIDUCIAL]  152.91,58.42 0 top
E$118  [MICRO-FIDUCIAL]  163.53,50.16 0 top
E$119  [MICRO-FIDUCIAL]  167.39,58.42 0 top
E$120  [MICRO-FIDUCIAL]  178,50.16 0 top
E$121  [MICRO-FIDUCIAL]  8.13,69.09 0 top
E$122  [MICRO-FIDUCIAL]  18.75,60.83 0 top
E$123  [MICRO-FIDUCIAL]  22.61,69.09 0 top
E$124  [MICRO-FIDUCIAL]  33.22,60.83 0 top
E$125  [MICRO-FIDUCIAL]  37.08,69.09 0 top
E$126  [MICRO-FIDUCIAL]  47.7,60.83 0 top
E$127  [MICRO-FIDUCIAL]  51.56,69.09 0 top
E$128  [MICRO-FIDUCIAL]  62.18,60.83 0 top
E$129  [MICRO-FIDUCIAL]  66.04,69.09 0 top
E$130  [MICRO-FIDUCIAL]  76.66,60.83 0 top
E$131  [MICRO-FIDUCIAL]  80.52,69.09 0 top
E$132  [MICRO-FIDUCIAL]  91.14,60.83 0 top
E$133  [MICRO-FIDUCIAL]  95,69.09 0 top
E$134  [MICRO-FIDUCIAL]  105.61,60.83 0 top
E$135  [MICRO-FIDUCIAL]  109.47,69.09 0 top
E$136  [MICRO-FIDUCIAL]  120.09,60.83 0 top
E$137  [MICRO-FIDUCIAL]  123.95,69.09 0 top
E$138  [MICRO-FIDUCIAL]  134.57,60.83 0 top
E$139  [MICRO-FIDUCIAL]  138.43,69.09 0 top
E$140  [MICRO-FIDUCIAL]  149.05,60.83 0 top
E$141  [MICRO-FIDUCIAL]  152.91,69.09 0 top
E$142  [MICRO-FIDUCIAL]  163.53,60.83 0 top
E$143  [MICRO-FIDUCIAL]  167.39,69.09 0 top
E$144  [MICRO-FIDUCIAL]  178,60.83 0 top
E$145  [MICRO-FIDUCIAL]  8.13,79.76 0 top
E$146  [MICRO-FIDUCIAL]  18.75,71.5 0 top
E$147  [MICRO-FIDUCIAL]  22.61,79.76 0 top
E$148  [MICRO-FIDUCIAL]  33.22,71.5 0 top
E$149  [MICRO-FIDUCIAL]  37.08,79.76 0 top
E$150  [MICRO-FIDUCIAL]  47.7,71.5 0 top
E$151  [MICRO-FIDUCIAL]  51.56,79.76 0 top
E$152  [MICRO-FIDUCIAL]  62.18,71.5 0 top
E$153  [MICRO-FIDUCIAL]  66.04,79.76 0 top
E$154  [MICRO-FIDUCIAL]  76.66,71.5 0 top
E$155  [MICRO-FIDUCIAL]  80.52,79.76 0 top
E$156  [MICRO-FIDUCIAL]  91.14,71.5 0 top
E$157  [MICRO-FIDUCIAL]  95,79.76 0 top
E$158  [MICRO-FIDUCIAL]  105.61,71.5 0 top
E$159  [MICRO-FIDUCIAL]  109.47,79.76 0 top
E$160  [MICRO-FIDUCIAL]  120.09,71.5 0 top
E$161  [MICRO-FIDUCIAL]  123.95,79.76 0 top
E$162  [MICRO-FIDUCIAL]  134.57,71.5 0 top
E$163  [MICRO-FIDUCIAL]  138.43,79.76 0 top
E$164  [MICRO-FIDUCIAL]  149.05,71.5 0 top
E$165  [MICRO-FIDUCIAL]  152.91,79.76 0 top
E$166  [MICRO-FIDUCIAL]  163.53,71.5 0 top
E$167  [MICRO-FIDUCIAL]  167.39,79.76 0 top
E$168  [MICRO-FIDUCIAL]  178,71.5 0 top
E$169  [MICRO-FIDUCIAL]  8.13,90.42 0 top
E$170  [MICRO-FIDUCIAL]  18.75,82.17 0 top
E$171  [MICRO-FIDUCIAL]  22.61,90.42 0 top
E$172  [MICRO-FIDUCIAL]  33.22,82.17 0 top
E$173  [MICRO-FIDUCIAL]  37.08,90.42 0 top
E$174  [MICRO-FIDUCIAL]  47.7,82.17 0 top
E$175  [MICRO-FIDUCIAL]  51.56,90.42 0 top
E$176  [MICRO-FIDUCIAL]  62.18,82.17 0 top
E$177  [MICRO-FIDUCIAL]  66.04,90.42 0 top
E$178  [MICRO-FIDUCIAL]  76.66,82.17 0 top
E$179  [MICRO-FIDUCIAL]  80.52,90.42 0 top
E$180  [MICRO-FIDUCIAL]  91.14,82.17 0 top
E$181  [MICRO-FIDUCIAL]  95,90.42 0 top
E$182  [MICRO-FIDUCIAL]  105.61,82.17 0 top
E$183  [MICRO-FIDUCIAL]  109.47,90.42 0 top
E$184  [MICRO-FIDUCIAL]  120.09,82.17 0 top
E$185  [MICRO-FIDUCIAL]  123.95,90.42 0 top
E$186  [MICRO-FIDUCIAL]  134.57,82.17 0 top
E$187  [MICRO-FIDUCIAL]  138.43,90.42 0 top
E$188  [MICRO-FIDUCIAL]  149.05,82.17 0 top
E$189  [MICRO-FIDUCIAL]  152.91,90.42 0 top
E$190  [MICRO-FIDUCIAL]  163.53,82.17 0 top
E$191  [MICRO-FIDUCIAL]  167.39,90.42 0 top
E$192  [MICRO-FIDUCIAL]  178,82.17 0 top
E$193  [MICRO-FIDUCIAL]  8.13,101.09 0 top
E$194  [MICRO-FIDUCIAL]  18.75,92.84 0 top
E$195  [MICRO-FIDUCIAL]  22.61,101.09 0 top
E$196  [MICRO-FIDUCIAL]  33.22,92.84 0 top
E$197  [MICRO-FIDUCIAL]  37.08,101.09 0 top
E$198  [MICRO-FIDUCIAL]  47.7,92.84 0 top
E$199  [MICRO-FIDUCIAL]  51.56,101.09 0 top
E$200  [MICRO-FIDUCIAL]  62.18,92.84 0 top
E$201  [MICRO-FIDUCIAL]  66.04,101.09 0 top
E$202  [MICRO-FIDUCIAL]  76.66,92.84 0 top
E$203  [MICRO-FIDUCIAL]  80.52,101.09 0 top
E$204  [MICRO-FIDUCIAL]  91.14,92.84 0 top
E$205  [MICRO-FIDUCIAL]  95,101.09 0 top
E$206  [MICRO-FIDUCIAL]  105.61,92.84 0 top
E$207  [MICRO-FIDUCIAL]  109.47,101.09 0 top
E$208  [MICRO-FIDUCIAL]  120.09,92.84 0 top
E$209  [MICRO-FIDUCIAL]  123.95,101.09 0 top
E$210  [MICRO-FIDUCIAL]  134.57,92.84 0 top
E$211  [MICRO-FIDUCIAL]  138.43,101.09 0 top
E$212  [MICRO-FIDUCIAL]  149.05,92.84 0 top
E$213  [MICRO-FIDUCIAL]  152.91,101.09 0 top
E$214  [MICRO-FIDUCIAL]  163.53,92.84 0 top
E$215  [MICRO-FIDUCIAL]  167.39,101.09 0 top
E$216  [MICRO-FIDUCIAL]  178,92.84 0 top
E$217  [MICRO-FIDUCIAL]  8.13,111.76 0 top
E$218  [MICRO-FIDUCIAL]  18.75,103.5 0 top
E$219  [MICRO-FIDUCIAL]  22.61,111.76 0 top
E$220  [MICRO-FIDUCIAL]  33.22,103.5 0 top
E$221  [MICRO-FIDUCIAL]  37.08,111.76 0 top
E$222  [MICRO-FIDUCIAL]  47.7,103.5 0 top
E$223  [MICRO-FIDUCIAL]  51.56,111.76 0 top
E$224  [MICRO-FIDUCIAL]  62.18,103.5 0 top
E$225  [MICRO-FIDUCIAL]  66.04,111.76 0 top
E$226  [MICRO-FIDUCIAL]  76.66,103.5 0 top
E$227  [MICRO-FIDUCIAL]  80.52,111.76 0 top
E$228  [MICRO-FIDUCIAL]  91.14,103.5 0 top
E$229  [MICRO-FIDUCIAL]  95,111.76 0 top
E$230  [MICRO-FIDUCIAL]  105.61,103.5 0 top
E$231  [MICRO-FIDUCIAL]  109.47,111.76 0 top
E$232  [MICRO-FIDUCIAL]  120.09,103.5 0 top
E$233  [MICRO-FIDUCIAL]  123.95,111.76 0 top
E$234  [MICRO-FIDUCIAL]  134.57,103.5 0 top
E$235  [MICRO-FIDUCIAL]  138.43,111.76 0 top
E$236  [MICRO-FIDUCIAL]  149.05,103.5 0 top
E$237  [MICRO-FIDUCIAL]  152.91,111.76 0 top
E$238  [MICRO-FIDUCIAL]  163.53,103.5 0 top
E$239  [MICRO-FIDUCIAL]  167.39,111.76 0 top
E$240  [MICRO-FIDUCIAL]  178,103.5 0 top
E$241  [FIDUCIAL-1.5X3]  4.57,11.94 0 top
E$247  [FIDUCIAL-1X2]  181.48,107.95 180 top
E$248  [FIDUCIAL-1X2]  181.74,12.7 0 top
JP1  [1X03]  19.56,9.4 90 top
JP2  [1X03]  34.04,9.4 90 top
JP3  [1X03]  48.51,9.4 90 top
JP4  [1X03]  62.99,9.4 90 top
JP5  [1X03]  77.47,9.4 90 top
JP6  [1X03]  91.95,9.4 90 top
JP7  [1X03]  106.43,9.4 90 top
JP8  [1X03]  120.9,9.4 90 top
JP9  [1X03]  135.38,9.4 90 top
JP10  [1X03]  149.86,9.4 90 top
JP11  [1X03]  164.34,9.4 90 top
JP12  [1X03]  178.82,9.4 90 top
JP13  [1X03]  19.56,20.07 90 top
JP14  [1X03]  34.04,20.07 90 top
JP15  [1X03]  48.51,20.07 90 top
JP16  [1X03]  62.99,20.07 90 top
JP17  [1X03]  77.47,20.07 90 top
JP18  [1X03]  91.95,20.07 90 top
JP19  [1X03]  106.43,20.07 90 top
JP20  [1X03]  120.9,20.07 90 top
JP21  [1X03]  135.38,20.07 90 top
JP22  [1X03]  149.86,20.07 90 top
JP23  [1X03]  164.34,20.07 90 top
JP24  [1X03]  178.82,20.07 90 top
JP25  [1X03]  19.56,30.73 90 top
JP26  [1X03]  34.04,30.73 90 top
JP27  [1X03]  48.51,30.73 90 top
JP28  [1X03]  62.99,30.73 90 top
JP29  [1X03]  77.47,30.73 90 top
JP30  [1X03]  91.95,30.73 90 top
JP31  [1X03]  106.43,30.73 90 top
JP32  [1X03]  120.9,30.73 90 top
JP33  [1X03]  135.38,30.73 90 top
JP34  [1X03]  149.86,30.73 90 top
JP35  [1X03]  164.34,30.73 90 top
JP36  [1X03]  178.82,30.73 90 top
JP37  [1X03]  19.56,41.4 90 top
JP38  [1X03]  34.04,41.4 90 top
JP39  [1X03]  48.51,41.4 90 top
JP40  [1X03]  62.99,41.4 90 top
JP41  [1X03]  77.47,41.4 90 top
JP42  [1X03]  91.95,41.4 90 top
JP43  [1X03]  106.43,41.4 90 top
JP44  [1X03]  120.9,41.4 90 top
JP45  [1X03]  135.38,41.4 90 top
JP46  [1X03]  149.86,41.4 90 top
JP47  [1X03]  164.34,41.4 90 top
JP48  [1X03]  178.82,41.4 90 top
JP49  [1X03]  19.56,52.07 90 top
JP50  [1X03]  34.04,52.07 90 top
JP51  [1X03]  48.51,52.07 90 top
JP52  [1X03]  62.99,52.07 90 top
JP53  [1X03]  77.47,52.07 90 top
JP54  [1X03]  91.95,52.07 90 top
JP55  [1X03]  106.43,52.07 90 top
JP56  [1X03]  120.9,52.07 90 top
JP57  [1X03]  135.38,52.07 90 top
JP58  [1X03]  149.86,52.07 90 top
JP59  [1X03]  164.34,52.07 90 top
JP60  [1X03]  178.82,52.07 90 top
JP61  [1X03]  19.56,62.74 90 top
JP62  [1X03]  34.04,62.74 90 top
JP63  [1X03]  48.51,62.74 90 top
JP64  [1X03]  62.99,62.74 90 top
JP65  [1X03]  77.47,62.74 90 top
JP66  [1X03]  91.95,62.74 90 top
JP67  [1X03]  106.43,62.74 90 top
JP68  [1X03]  120.9,62.74 90 top
JP69  [1X03]  135.38,62.74 90 top
JP70  [1X03]  149.86,62.74 90 top
JP71  [1X03]  164.34,62.74 90 top
JP72  [1X03]  178.82,62.74 90 top
JP73  [1X03]  19.56,73.41 90 top
JP74  [1X03]  34.04,73.41 90 top
JP75  [1X03]  48.51,73.41 90 top
JP76  [1X03]  62.99,73.41 90 top
JP77  [1X03]  77.47,73.41 90 top
JP78  [1X03]  91.95,73.41 90 top
JP79  [1X03]  106.43,73.41 90 top
JP80  [1X03]  120.9,73.41 90 top
JP81  [1X03]  135.38,73.41 90 top
JP82  [1X03]  149.86,73.41 90 top
JP83  [1X03]  164.34,73.41 90 top
JP84  [1X03]  178.82,73.41 90 top
JP85  [1X03]  19.56,84.07 90 top
JP86  [1X03]  34.04,84.07 90 top
JP87  [1X03]  48.51,84.07 90 top
JP88  [1X03]  62.99,84.07 90 top
JP89  [1X03]  77.47,84.07 90 top
JP90  [1X03]  91.95,84.07 90 top
JP91  [1X03]  106.43,84.07 90 top
JP92  [1X03]  120.9,84.07 90 top
JP93  [1X03]  135.38,84.07 90 top
JP94  [1X03]  149.86,84.07 90 top
JP95  [1X03]  164.34,84.07 90 top
JP96  [1X03]  178.82,84.07 90 top
JP97  [1X03]  19.56,94.74 90 top
JP98  [1X03]  34.04,94.74 90 top
JP99  [1X03]  48.51,94.74 90 top
JP100  [1X03]  62.99,94.74 90 top
JP101  [1X03]  77.47,94.74 90 top
JP102  [1X03]  91.95,94.74 90 top
JP103  [1X03]  106.43,94.74 90 top
JP104  [1X03]  120.9,94.74 90 top
JP105  [1X03]  135.38,94.74 90 top
JP106  [1X03]  149.86,94.74 90 top
JP107  [1X03]  164.34,94.74 90 top
JP108  [1X03]  178.82,94.74 90 top
JP109  [1X03]  19.56,105.41 90 top
JP110  [1X03]  34.04,105.41 90 top
JP111  [1X03]  48.51,105.41 90 top
JP112  [1X03]  62.99,105.41 90 top
JP113  [1X03]  77.47,105.41 90 top
JP114  [1X03]  91.95,105.41 90 top
JP115  [1X03]  106.43,105.41 90 top
JP116  [1X03]  120.9,105.41 90 top
JP117  [1X03]  135.38,105.41 90 top
JP118  [1X03]  149.86,105.41 90 top
JP119  [1X03]  164.34,105.41 90 top
JP120  [1X03]  178.82,105.41 90 top
R1  10K  [0402-RES]  14.48,9.4 180 top
R2  10K  [0402-RES]  17.27,12.19 90 top
R3  1.5K  [0402-RES]  13.21,15.75 180 top
R4  100K  [0402-RES]  17.02,14.48 180 top
R5  10K  [0402-RES]  28.96,9.4 180 top
R6  10K  [0402-RES]  31.75,12.19 90 top
R7  1.5K  [0402-RES]  27.69,15.75 180 top
R8  100K  [0402-RES]  31.5,14.48 180 top
R9  10K  [0402-RES]  43.43,9.4 180 top
R10  10K  [0402-RES]  46.23,12.19 90 top
R11  1.5K  [0402-RES]  42.16,15.75 180 top
R12  100K  [0402-RES]  45.97,14.48 180 top
R13  10K  [0402-RES]  57.91,9.4 180 top
R14  10K  [0402-RES]  60.71,12.19 90 top
R15  1.5K  [0402-RES]  56.64,15.75 180 top
R16  100K  [0402-RES]  60.45,14.48 180 top
R17  10K  [0402-RES]  72.39,9.4 180 top
R18  10K  [0402-RES]  75.18,12.19 90 top
R19  1.5K  [0402-RES]  71.12,15.75 180 top
R20  100K  [0402-RES]  74.93,14.48 180 top
R21  10K  [0402-RES]  86.87,9.4 180 top
R22  10K  [0402-RES]  89.66,12.19 90 top
R23  1.5K  [0402-RES]  85.6,15.75 180 top
R24  100K  [0402-RES]  89.41,14.48 180 top
R25  10K  [0402-RES]  101.35,9.4 180 top
R26  10K  [0402-RES]  104.14,12.19 90 top
R27  1.5K  [0402-RES]  100.08,15.75 180 top
R28  100K  [0402-RES]  103.89,14.48 180 top
R29  10K  [0402-RES]  115.82,9.4 180 top
R30  10K  [0402-RES]  118.62,12.19 90 top
R31  1.5K  [0402-RES]  114.55,15.75 180 top
R32  100K  [0402-RES]  118.36,14.48 180 top
R33  10K  [0402-RES]  130.3,9.4 180 top
R34  10K  [0402-RES]  133.1,12.19 90 top
R35  1.5K  [0402-RES]  129.03,15.75 180 top
R36  100K  [0402-RES]  132.84,14.48 180 top
R37  10K  [0402-RES]  144.78,9.4 180 top
R38  10K  [0402-RES]  147.57,12.19 90 top
R39  1.5K  [0402-RES]  143.51,15.75 180 top
R40  100K  [0402-RES]  147.32,14.48 180 top
R41  10K  [0402-RES]  159.26,9.4 180 top
R42  10K  [0402-RES]  162.05,12.19 90 top
R43  1.5K  [0402-RES]  157.99,15.75 180 top
R44  100K  [0402-RES]  161.8,14.48 180 top
R45  10K  [0402-RES]  173.74,9.4 180 top
R46  10K  [0402-RES]  176.53,12.19 90 top
R47  1.5K  [0402-RES]  172.47,15.75 180 top
R48  100K  [0402-RES]  176.28,14.48 180 top
R49  10K  [0402-RES]  14.48,20.07 180 top
R50  10K  [0402-RES]  17.27,22.86 90 top
R51  1.5K  [0402-RES]  13.21,26.42 180 top
R52  100K  [0402-RES]  17.02,25.15 180 top
R53  10K  [0402-RES]  28.96,20.07 180 top
R54  10K  [0402-RES]  31.75,22.86 90 top
R55  1.5K  [0402-RES]  27.69,26.42 180 top
R56  100K  [0402-RES]  31.5,25.15 180 top
R57  10K  [0402-RES]  43.43,20.07 180 top
R58  10K  [0402-RES]  46.23,22.86 90 top
R59  1.5K  [0402-RES]  42.16,26.42 180 top
R60  100K  [0402-RES]  45.97,25.15 180 top
R61  10K  [0402-RES]  57.91,20.07 180 top
R62  10K  [0402-RES]  60.71,22.86 90 top
R63  1.5K  [0402-RES]  56.64,26.42 180 top
R64  100K  [0402-RES]  60.45,25.15 180 top
R65  10K  [0402-RES]  72.39,20.07 180 top
R66  10K  [0402-RES]  75.18,22.86 90 top
R67  1.5K  [0402-RES]  71.12,26.42 180 top
R68  100K  [0402-RES]  74.93,25.15 180 top
R69  10K  [0402-RES]  86.87,20.07 180 top
R70  10K  [0402-RES]  89.66,22.86 90 top
R71  1.5K  [0402-RES]  85.6,26.42 180 top
R72  100K  [0402-RES]  89.41,25.15 180 top
R73  10K  [0402-RES]  101.35,20.07 180 top
R74  10K  [0402-RES]  104.14,22.86 90 top
R75  1.5K  [0402-RES]  100.08,26.42 180 top
R76  100K  [0402-RES]  103.89,25.15 180 top
R77  10K  [0402-RES]  115.82,20.07 180 top
R78  10K  [0402-RES]  118.62,22.86 90 top
R79  1.5K  [0402-RES]  114.55,26.42 180 top
R80  100K  [0402-RES]  118.36,25.15 180 top
R81  10K  [0402-RES]  130.3,20.07 180 top
R82  10K  [0402-RES]  133.1,22.86 90 top
R83  1.5K  [0402-RES]  129.03,26.42 180 top
R84  100K  [0402-RES]  132.84,25.15 180 top
R85  10K  [0402-RES]  144.78,20.07 180 top
R86  10K  [0402-RES]  147.57,22.86 90 top
R87  1.5K  [0402-RES]  143.51,26.42 180 top
R88  100K  [0402-RES]  147.32,25.15 180 top
R89  10K  [0402-RES]  159.26,20.07 180 top
R90  10K  [0402-RES]  162.05,22.86 90 top
R91  1.5K  [0402-RES]  157.99,26.42 180 top
R92  100K  [0402-RES]  161.8,25.15 180 top
R93  10K  [0402-RES]  173.74,20.07 180 top
R94  10K  [0402-RES]  176.53,22.86 90 top
R95  1.5K  [0402-RES]  172.47,26.42 180 top
R96  100K  [0402-RES]  176.28,25.15 180 top
R97  10K  [0402-RES]  14.48,30.73 180 top
R98  10K  [0402-RES]  17.27,33.53 90 top
R99  1.5K  [0402-RES]  13.21,37.08 180 top
R100  100K  [0402-RES]  17.02,35.81 180 top
R101  10K  [0402-RES]  28.96,30.73 180 top
R102  10K  [0402-RES]  31.75,33.53 90 top
R103  1.5K  [0402-RES]  27.69,37.08 180 top
R104  100K  [0402-RES]  31.5,35.81 180 top
R105  10K  [0402-RES]  43.43,30.73 180 top
R106  10K  [0402-RES]  46.23,33.53 90 top
R107  1.5K  [0402-RES]  42.16,37.08 180 top
R108  100K  [0402-RES]  45.97,35.81 180 top
R109  10K  [0402-RES]  57.91,30.73 180 top
R110  10K  [0402-RES]  60.71,33.53 90 top
R111  1.5K  [0402-RES]  56.64,37.08 180 top
R112  100K  [0402-RES]  60.45,35.81 180 top
R113  10K  [0402-RES]  72.39,30.73 180 top
R114  10K  [0402-RES]  75.18,33.53 90 top
R115  1.5K  [0402-RES]  71.12,37.08 180 top
R116  100K  [0402-RES]  74.93,35.81 180 top
R117  10K  [0402-RES]  86.87,30.73 180 top
R118  10K  [0402-RES]  89.66,33.53 90 top
R119  1.5K  [0402-RES]  85.6,37.08 180 top
R120  100K  [0402-RES]  89.41,35.81 180 top
R121  10K  [0402-RES]  101.35,30.73 180 top
R122  10K  [0402-RES]  104.14,33.53 90 top
R123  1.5K  [0402-RES]  100.08,37.08 180 top
R124  100K  [0402-RES]  103.89,35.81 180 top
R125  10K  [0402-RES]  115.82,30.73 180 top
R126  10K  [0402-RES]  118.62,33.53 90 top
R127  1.5K  [0402-RES]  114.55,37.08 180 top
R128  100K  [0402-RES]  118.36,35.81 180 top
R129  10K  [0402-RES]  130.3,30.73 180 top
R130  10K  [0402-RES]  133.1,33.53 90 top
R131  1.5K  [0402-RES]  129.03,37.08 180 top
R132  100K  [0402-RES]  132.84,35.81 180 top
R133  10K  [0402-RES]  144.78,30.73 180 top
R134  10K  [0402-RES]  147.57,33.53 90 top
R135  1.5K  [0402-RES]  143.51,37.08 180 top
R136  100K  [0402-RES]  147.32,35.81 180 top
R137  10K  [0402-RES]  159.26,30.73 180 top
R138  10K  [0402-RES]  162.05,33.53 90 top
R139  1.5K  [0402-RES]  157.99,37.08 180 top
R140  100K  [0402-RES]  161.8,35.81 180 top
R141  10K  [0402-RES]  173.74,30.73 180 top
R142  10K  [0402-RES]  176.53,33.53 90 top
R143  1.5K  [0402-RES]  172.47,37.08 180 top
R144  100K  [0402-RES]  176.28,35.81 180 top
R145  10K  [0402-RES]  14.48,41.4 180 top
R146  10K  [0402-RES]  17.27,44.2 90 top
R147  1.5K  [0402-RES]  13.21,47.75 180 top
R148  100K  [0402-RES]  17.02,46.48 180 top
R149  10K  [0402-RES]  28.96,41.4 180 top
R150  10K  [0402-RES]  31.75,44.2 90 top
R151  1.5K  [0402-RES]  27.69,47.75 180 top
R152  100K  [0402-RES]  31.5,46.48 180 top
R153  10K  [0402-RES]  43.43,41.4 180 top
R154  10K  [0402-RES]  46.23,44.2 90 top
R155  1.5K  [0402-RES]  42.16,47.75 180 top
R156  100K  [0402-RES]  45.97,46.48 180 top
R157  10K  [0402-RES]  57.91,41.4 180 top
R158  10K  [0402-RES]  60.71,44.2 90 top
R159  1.5K  [0402-RES]  56.64,47.75 180 top
R160  100K  [0402-RES]  60.45,46.48 180 top
R161  10K  [0402-RES]  72.39,41.4 180 top
R162  10K  [0402-RES]  75.18,44.2 90 top
R163  1.5K  [0402-RES]  71.12,47.75 180 top
R164  100K  [0402-RES]  74.93,46.48 180 top
R165  10K  [0402-RES]  86.87,41.4 180 top
R166  10K  [0402-RES]  89.66,44.2 90 top
R167  1.5K  [0402-RES]  85.6,47.75 180 top
R168  100K  [0402-RES]  89.41,46.48 180 top
R169  10K  [0402-RES]  101.35,41.4 180 top
R170  10K  [0402-RES]  104.14,44.2 90 top
R171  1.5K  [0402-RES]  100.08,47.75 180 top
R172  100K  [0402-RES]  103.89,46.48 180 top
R173  10K  [0402-RES]  115.82,41.4 180 top
R174  10K  [0402-RES]  118.62,44.2 90 top
R175  1.5K  [0402-RES]  114.55,47.75 180 top
R176  100K  [0402-RES]  118.36,46.48 180 top
R177  10K  [0402-RES]  130.3,41.4 180 top
R178  10K  [0402-RES]  133.1,44.2 90 top
R179  1.5K  [0402-RES]  129.03,47.75 180 top
R180  100K  [0402-RES]  132.84,46.48 180 top
R181  10K  [0402-RES]  144.78,41.4 180 top
R182  10K  [0402-RES]  147.57,44.2 90 top
R183  1.5K  [0402-RES]  143.51,47.75 180 top
R184  100K  [0402-RES]  147.32,46.48 180 top
R185  10K  [0402-RES]  159.26,41.4 180 top
R186  10K  [0402-RES]  162.05,44.2 90 top
R187  1.5K  [0402-RES]  157.99,47.75 180 top
R188  100K  [0402-RES]  161.8,46.48 180 top
R189  10K  [0402-RES]  173.74,41.4 180 top
R190  10K  [0402-RES]  176.53,44.2 90 top
R191  1.5K  [0402-RES]  172.47,47.75 180 top
R192  100K  [0402-RES]  176.28,46.48 180 top
R193  10K  [0402-RES]  14.48,52.07 180 top
R194  10K  [0402-RES]  17.27,54.86 90 top
R195  1.5K  [0402-RES]  13.21,58.42 180 top
R196  100K  [0402-RES]  17.02,57.15 180 top
R197  10K  [0402-RES]  28.96,52.07 180 top
R198  10K  [0402-RES]  31.75,54.86 90 top
R199  1.5K  [0402-RES]  27.69,58.42 180 top
R200  100K  [0402-RES]  31.5,57.15 180 top
R201  10K  [0402-RES]  43.43,52.07 180 top
R202  10K  [0402-RES]  46.23,54.86 90 top
R203  1.5K  [0402-RES]  42.16,58.42 180 top
R204  100K  [0402-RES]  45.97,57.15 180 top
R205  10K  [0402-RES]  57.91,52.07 180 top
R206  10K  [0402-RES]  60.71,54.86 90 top
R207  1.5K  [0402-RES]  56.64,58.42 180 top
R208  100K  [0402-RES]  60.45,57.15 180 top
R209  10K  [0402-RES]  72.39,52.07 180 top
R210  10K  [0402-RES]  75.18,54.86 90 top
R211  1.5K  [0402-RES]  71.12,58.42 180 top
R212  100K  [0402-RES]  74.93,57.15 180 top
R213  10K  [0402-RES]  86.87,52.07 180 top
R214  10K  [0402-RES]  89.66,54.86 90 top
R215  1.5K  [0402-RES]  85.6,58.42 180 top
R216  100K  [0402-RES]  89.41,57.15 180 top
R217  10K  [0402-RES]  101.35,52.07 180 top
R218  10K  [0402-RES]  104.14,54.86 90 top
R219  1.5K  [0402-RES]  100.08,58.42 180 top
R220  100K  [0402-RES]  103.89,57.15 180 top
R221  10K  [0402-RES]  115.82,52.07 180 top
R222  10K  [0402-RES]  118.62,54.86 90 top
R223  1.5K  [0402-RES]  114.55,58.42 180 top
R224  100K  [0402-RES]  118.36,57.15 180 top
R225  10K  [0402-RES]  130.3,52.07 180 top
R226  10K  [0402-RES]  133.1,54.86 90 top
R227  1.5K  [0402-RES]  129.03,58.42 180 top
R228  100K  [0402-RES]  132.84,57.15 180 top
R229  10K  [0402-RES]  144.78,52.07 180 top
R230  10K  [0402-RES]  147.57,54.86 90 top
R231  1.5K  [0402-RES]  143.51,58.42 180 top
R232  100K  [0402-RES]  147.32,57.15 180 top
R233  10K  [0402-RES]  159.26,52.07 180 top
R234  10K  [0402-RES]  162.05,54.86 90 top
R235  1.5K  [0402-RES]  157.99,58.42 180 top
R236  100K  [0402-RES]  161.8,57.15 180 top
R237  10K  [0402-RES]  173.74,52.07 180 top
R238  10K  [0402-RES]  176.53,54.86 90 top
R239  1.5K  [0402-RES]  172.47,58.42 180 top
R240  100K  [0402-RES]  176.28,57.15 180 top
R241  10K  [0402-RES]  14.48,62.74 180 top
R242  10K  [0402-RES]  17.27,65.53 90 top
R243  1.5K  [0402-RES]  13.21,69.09 180 top
R244  100K  [0402-RES]  17.02,67.82 180 top
R245  10K  [0402-RES]  28.96,62.74 180 top
R246  10K  [0402-RES]  31.75,65.53 90 top
R247  1.5K  [0402-RES]  27.69,69.09 180 top
R248  100K  [0402-RES]  31.5,67.82 180 top
R249  10K  [0402-RES]  43.43,62.74 180 top
R250  10K  [0402-RES]  46.23,65.53 90 top
R251  1.5K  [0402-RES]  42.16,69.09 180 top
R252  100K  [0402-RES]  45.97,67.82 180 top
R253  10K  [0402-RES]  57.91,62.74 180 top
R254  10K  [0402-RES]  60.71,65.53 90 top
R255  1.5K  [0402-RES]  56.64,69.09 180 top
R256  100K  [0402-RES]  60.45,67.82 180 top
R257  10K  [0402-RES]  72.39,62.74 180 top
R258  10K  [0402-RES]  75.18,65.53 90 top
R259  1.5K  [0402-RES]  71.12,69.09 180 top
R260  100K  [0402-RES]  74.93,67.82 180 top
R261  10K  [0402-RES]  86.87,62.74 180 top
R262  10K  [0402-RES]  89.66,65.53 90 top
R263  1.5K  [0402-RES]  85.6,69.09 180 top
R264  100K  [0402-RES]  89.41,67.82 180 top
R265  10K  [0402-RES]  101.35,62.74 180 top
R266  10K  [0402-RES]  104.14,65.53 90 top
R267  1.5K  [0402-RES]  100.08,69.09 180 top
R268  100K  [0402-RES]  103.89,67.82 180 top
R269  10K  [0402-RES]  115.82,62.74 180 top
R270  10K  [0402-RES]  118.62,65.53 90 top
R271  1.5K  [0402-RES]  114.55,69.09 180 top
R272  100K  [0402-RES]  118.36,67.82 180 top
R273  10K  [0402-RES]  130.3,62.74 180 top
R274  10K  [0402-RES]  133.1,65.53 90 top
R275  1.5K  [0402-RES]  129.03,69.09 180 top
R276  100K  [0402-RES]  132.84,67.82 180 top
R277  10K  [0402-RES]  144.78,62.74 180 top
R278  10K  [0402-RES]  147.57,65.53 90 top
R279  1.5K  [0402-RES]  143.51,69.09 180 top
R280  100K  [0402-RES]  147.32,67.82 180 top
R281  10K  [0402-RES]  159.26,62.74 180 top
R282  10K  [0402-RES]  162.05,65.53 90 top
R283  1.5K  [0402-RES]  157.99,69.09 180 top
R284  100K  [0402-RES]  161.8,67.82 180 top
R285  10K  [0402-RES]  173.74,62.74 180 top
R286  10K  [0402-RES]  176.53,65.53 90 top
R287  1.5K  [0402-RES]  172.47,69.09 180 top
R288  100K  [0402-RES]  176.28,67.82 180 top
R289  10K  [0402-RES]  14.48,73.41 180 top
R290  10K  [0402-RES]  17.27,76.2 90 top
R291  1.5K  [0402-RES]  13.21,79.76 180 top
R292  100K  [0402-RES]  17.02,78.49 180 top
R293  10K  [0402-RES]  28.96,73.41 180 top
R294  10K  [0402-RES]  31.75,76.2 90 top
R295  1.5K  [0402-RES]  27.69,79.76 180 top
R296  100K  [0402-RES]  31.5,78.49 180 top
R297  10K  [0402-RES]  43.43,73.41 180 top
R298  10K  [0402-RES]  46.23,76.2 90 top
R299  1.5K  [0402-RES]  42.16,79.76 180 top
R300  100K  [0402-RES]  45.97,78.49 180 top
R301  10K  [0402-RES]  57.91,73.41 180 top
R302  10K  [0402-RES]  60.71,76.2 90 top
R303  1.5K  [0402-RES]  56.64,79.76 180 top
R304  100K  [0402-RES]  60.45,78.49 180 top
R305  10K  [0402-RES]  72.39,73.41 180 top
R306  10K  [0402-RES]  75.18,76.2 90 top
R307  1.5K  [0402-RES]  71.12,79.76 180 top
R308  100K  [0402-RES]  74.93,78.49 180 top
R309  10K  [0402-RES]  86.87,73.41 180 top
R310  10K  [0402-RES]  89.66,76.2 90 top
R311  1.5K  [0402-RES]  85.6,79.76 180 top
R312  100K  [0402-RES]  89.41,78.49 180 top